# EAGLE board WIBL (EAGLE 9.6.2)
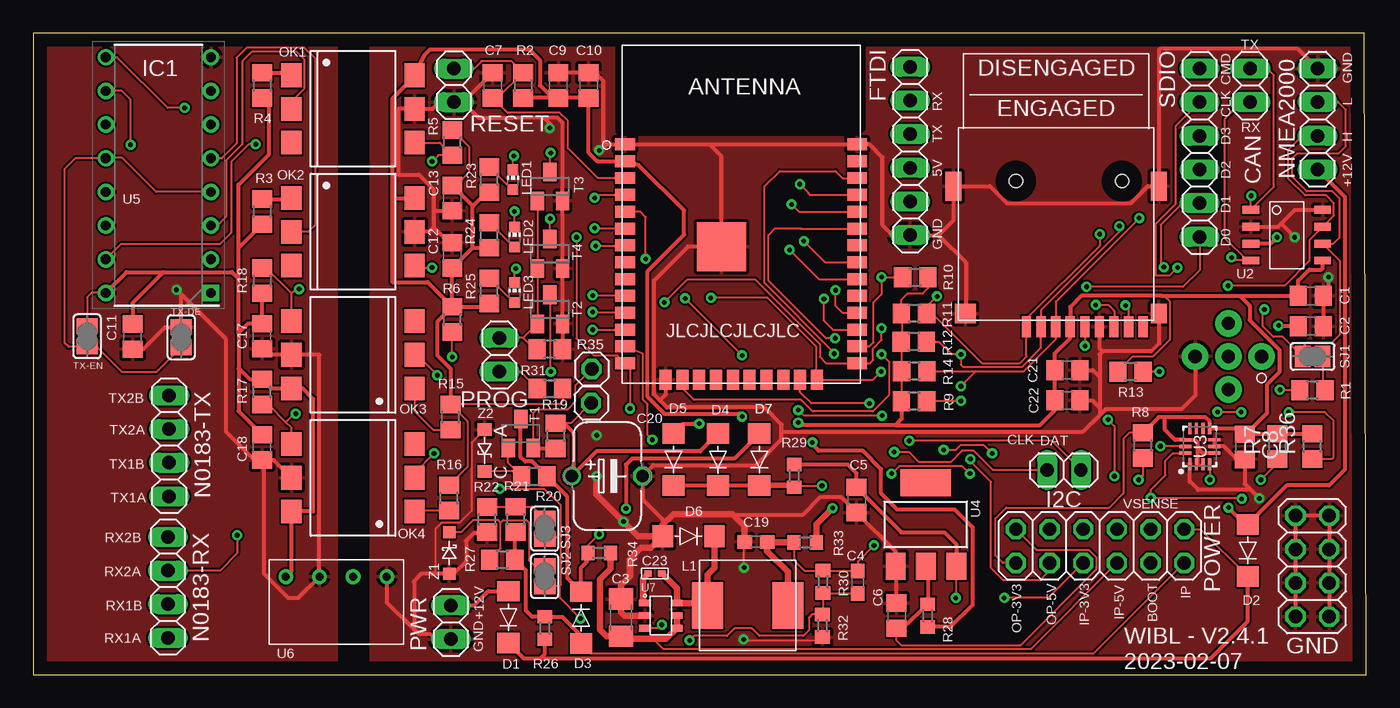
[diagram p0: board, top side]
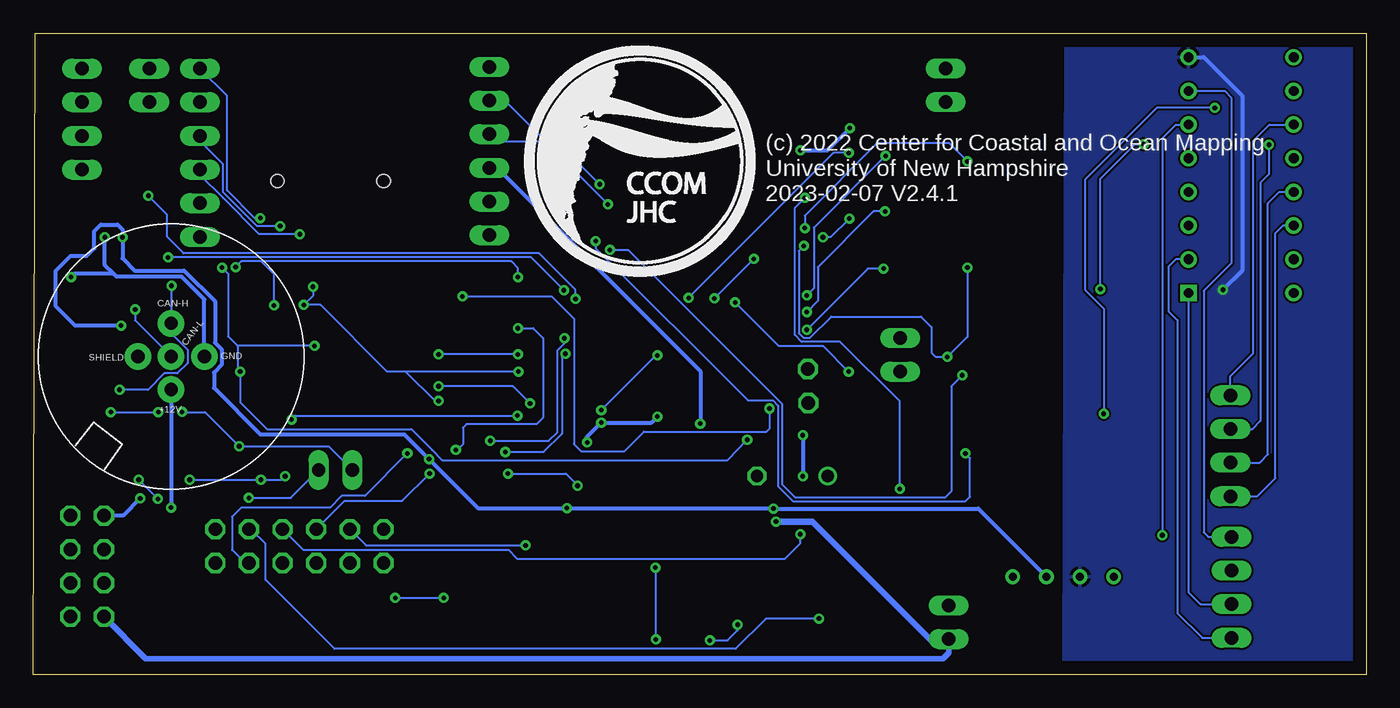
[diagram p1: board, bottom side, seen from below]

Size 100.58 x 48.39 mm. Coordinates in mm from the lower left corner, seen from the top.
Outline: 0,0 100.58,0 100.43,48.39 0,48.39 0,0
Copper layers (1*16): Top 0.035mm / dielectric 1.5mm / Bottom 0.035mm
Design rules "default": minimum track width 6mil, minimum drill 0.35mm, track to track 6mil, track to pad 6mil, pad to pad 6mil, via to via 6mil, smd to smd 6mil, copper to edge 40mil, drill to drill 6mil, minimum pad ring 10mil, minimum via ring 8mil, stop-mask expansion 4mil, vias tented up to drill 0mil, thermal gap 10mil

## Footprints (pad centres in the part's own frame; a part is rotated, then mirrored left to right if it is on the bottom)
C0805 = smd 1.3 x 1.5: 1 -0.95,0; 2 0.95,0
C1206 = smd 1.6 x 1.8: 1 -1.4,0; 2 1.4,0
C0603 = smd 1.1 x 1: 1 -0.85,0; 2 0.85,0
P128-50 = drill 0.914: + -2.667,0 | drill 0.914 octagon: - 2.667,0
C0402 = smd 0.55 x 0.5: P$1 -0.525,0; P$2 0.525,0
1X02 = drill 1.016 long: 1 -1.27,0; 2 1.27,0
DO-214AC = smd 1.524 x 1.676: A 1.956,0; K -1.956,0
1X06 = drill 1.016 long: 1 -6.35,0; 2 -3.81,0; 3 -1.27,0; 4 1.27,0; 5 3.81,0; 6 6.35,0
2X04 = drill 1.016 octagon: 1 -3.81,-1.27; 2 -3.81,1.27; 3 -1.27,-1.27; 4 -1.27,1.27; 5 1.27,-1.27; 6 1.27,1.27; 7 3.81,-1.27; 8 3.81,1.27
XUNPU-MICROSD-SOCKET = smd 0.7 x 1.6: 1 2.25,7.475; 2 1.15,7.475; 3 0.05,7.475; 4 -1.05,7.475; 5 -2.15,7.475; 6 -3.25,7.475; 7 -4.35,7.475; 8 -5.45,7.475; CD -6.55,7.475 | smd 1.2 x 1.5: GND1 -7.75,6.475 | smd 1.2 x 2.2: GND2 -7.75,-3.125; GND3 7.75,-3.125 | smd 1.6 x 1.5: GND4 6.85,6.475 | hole 1: -4.95,-3.525; 3.05,-3.525
DIP794W53P254L1930H508Q16N = drill 0.73 pad 1.13 square: 1 -3.97,8.89 | drill 0.73 pad 1.13: 2 -3.97,6.35; 3 -3.97,3.81; 4 -3.97,1.27; 5 -3.97,-1.27; 6 -3.97,-3.81; 7 -3.97,-6.35; 8 -3.97,-8.89; 9 3.97,-8.89; 10 3.97,-6.35; 11 3.97,-3.81; 12 3.97,-1.27; 13 3.97,1.27; 14 3.97,3.81; 15 3.97,6.35; 16 3.97,8.89
1X01 = drill 1.016 octagon: 1 0,0
NMEA2000 = drill 1 pad 2: 1 2.5,0; 2 0,-2.5; 3 -2.5,0; 4 0,2.5; 5 0,0
MWSA0603S = smd 2.35 x 3.5: P$1 -3.025,0; P$2 3.025,0
CHIP-LED0603 = smd 0.8 x 0.8: A 0,-0.75; C 0,0.75
1X04 = drill 1.016 long: 1 -3.81,0; 2 -1.27,0; 3 1.27,0; 4 3.81,0
DIL6-SMD = smd 1.78 x 1.52: 1 -2.54,-4.645; 2 0,-4.645; 3 2.54,-4.645; 4 2.54,4.645; 5 0,4.645; 6 -2.54,4.645
2X06 = drill 1.016 octagon: 1 -6.35,-1.27; 2 -6.35,1.27; 3 -3.81,-1.27; 4 -3.81,1.27; 5 -1.27,-1.27; 6 -1.27,1.27; 7 1.27,-1.27; 8 1.27,1.27; 9 3.81,-1.27; 10 3.81,1.27; 11 6.35,-1.27; 12 6.35,1.27
R0805 = smd 1.3 x 1.5: 1 -0.95,0; 2 0.95,0
R0603 = smd 1 x 1.1: 1 -0.85,0; 2 0.85,0
SJ = smd 1.168 x 1.6: 1 -0.762,0; 2 0.762,0
SOT23-BEC = smd 1 x 1.4: B -0.95,-1.1; C 0,1.1; E 0.95,-1.1
SOT23 = smd 1 x 1.4: 1 -0.95,-1.1; 2 0.95,-1.1; 3 0,1.1
ESPS32-WROOM-32E = smd 1.5 x 0.9: 1 -8.75,8.34; 2 -8.75,7.07; 3 -8.75,5.8; 4 -8.75,4.53; 5 -8.75,3.26; 6 -8.75,1.99; 7 -8.75,0.72; 8 -8.75,-0.55; 9 -8.75,-1.82; 10 -8.75,-3.09; 11 -8.75,-4.36; 12 -8.75,-5.63; 13 -8.75,-6.9; 14 -8.75,-8.17; 25 8.75,-8.17; 26 8.75,-6.9; 27 8.75,-5.63; 28 8.75,-4.36; 29 8.75,-3.09; 30 8.75,-1.82; 31 8.75,-0.55; 32 8.75,0.72; 33 8.75,1.99; 34 8.75,3.26; 35 8.75,4.53; 36 8.75,5.8; 37 8.75,7.07; 38 8.75,8.34 | smd 0.9 x 1.5: 15 -5.71,-9.42; 16 -4.44,-9.42; 17 -3.17,-9.42; 18 -1.9,-9.42; 19 -0.63,-9.42; 20 0.64,-9.42; 21 1.91,-9.42; 22 3.18,-9.42; 23 4.45,-9.42; 24 5.71,-9.42 | smd 3.7 x 3.7: THERM -1.5,0.62
SOIC8 = smd 0.6 x 1.27: 1 -1.905,-2.7; 2 -0.635,-2.7; 3 0.635,-2.7; 4 1.905,-2.7; 5 1.905,2.7; 6 0.635,2.7; 7 -0.635,2.7; 8 -1.905,2.7
LGA-14-2.5X3MM = smd 0.9 x 0.25: 1 -1.35,0.75; 2 -1.35,0.25; 3 -1.35,-0.25; 4 -1.35,-0.75; 8 1.35,-0.75; 9 1.35,-0.25; 10 1.35,0.25; 11 1.35,0.75 | smd 0.25 x 0.9: 5 -0.5,-1.1; 6 0,-1.1; 7 0.5,-1.1; 12 0.5,1.1; 13 0,1.1; 14 -0.5,1.1
SOT223 = smd 1.499 x 2.007: 1 -2.261,-3.15; 2 0.025,-3.15; 3 2.311,-3.15 | smd 3.81 x 2.007: 4 0,3.15
RFM-0505S = drill 0.6: 1 -3.81,0; 2 -1.27,0; 3 1.27,0; 4 3.81,0
SOT-23-6L = smd 0.9 x 0.5: 1 -1.2,0.95; 2 -1.2,0; 3 -1.2,-0.95; 4 1.2,-0.95; 5 1.2,0; 6 1.2,0.95
SOD123 = smd 0.9 x 0.95: 1 -1.575,0; 2 1.575,0
SOD-123FL = smd 0.95 x 1.05: A -1.575,0; K 1.575,0

## Placement (x,y rotation side)
C1  0.1u  [C0805]  96.39,28.57 0 top
C2  0.1u  [C0805]  96.39,26.29 0 top
C3  10uF  [C1206]  44.35,4.31 90 top
C4  33pF  [C0603]  62.22,6.97 90 top
C5  10u  [C0805]  62.12,13.18 270 top
C6  10u  [C0805]  65.14,4.46 90 top
C7  1uF  [C0805]  34.67,44.45 90 top
C8  0.1u  [C0805]  91.4,17.18 270 top
C9  10u  [C0805]  39.62,44.45 90 top
C10  0.1u  [C0805]  41.91,44.45 90 top
C11  0.1u  [C0805]  7.51,25.5 270 top
C12  0.1u  [C0805]  31.62,31.62 90 top
C13  0.1u  [C0805]  31.62,35.94 270 top
C17  0.1u  [C0805]  17.27,25.53 270 top
C18  0.1u  [C0805]  17.27,17.14 270 top
C19  22uF  [C0603]  54.52,10.02 0 top
C20  0.47F  [P128-50]  43.31,14.99 0 top
C21  10u  [C0805]  78.03,22.97 0 top
C22  0.1u  [C0805]  78.03,20.69 0 top
C23  100nF  [C0402]  46.91,7.65 0 top
CAN  CAN-TEST  [1X02]  91.82,44.45 90 top
D1  SS14  [DO-214AC]  35.85,4.34 90 top
D2  SS14  [DO-214AC]  91.63,9.37 90 top
D3  SS14  [DO-214AC]  41.34,4.31 270 top
D4  SS14  [DO-214AC]  51.66,16.23 90 top
D5  SS14  [DO-214AC]  48.31,16.23 90 top
D6  SS14  [DO-214AC]  49.45,10.44 180 top
D7  SS14  [DO-214AC]  54.79,16.23 90 top
FTDI  FTDI/ICSP  [1X06]  66.17,39.5 90 top
GND  [2X04]  96.51,8.19 90 top
H1  TF-115  [XUNPU-MICROSD-SOCKET]  77.19,33.72 180 top
I2C  I2C_TEST  [1X02]  77.77,15.44 180 top
IC1  SN65C1168N  [DIP794W53P254L1930H508Q16N]  9.45,37.68 180 top
JP1  [1X01]  42.14,23.05 0 top
JP2  HPC-05PMMP-SF8001  [NMEA2000]  90.17,24 0 top
JP3  [1X01]  42.1,20.5 0 top
L1  15uH  [MWSA0603S]  53.91,5.22 0 top
LED1  [CHIP-LED0603]  36.2,37.34 0 top
LED2  [CHIP-LED0603]  36.32,33.02 0 top
LED3  [CHIP-LED0603]  36.32,28.83 0 top
N0183-RX  [1X04]  10.17,6.59 270 top
N0183-TX  TX_TEST  [1X04]  10.26,17.26 270 top
NMEA2000  NMEA2000-2  [1X04]  96.9,41.91 90 top
OK1  H11L1MS  [DIL6-SMD]  24.13,42.67 270 top
OK2  H11L1MS  [DIL6-SMD]  24.13,33.4 270 top
OK3  H11L1MS  [DIL6-SMD]  24.13,24.13 90 top
OK4  H11L1MS  [DIL6-SMD]  24.13,14.86 90 top
POWER  [2X06]  80.49,9.7 180 top
PROG  PROG  [1X02]  35.18,24.13 90 top
PWR  [1X02]  31.51,3.96 90 top
R1  120R  [R0805]  96.52,21.46 180 top
R2  10k  [R0805]  36.96,44.45 270 top
R3  1k  [R0805]  17.27,34.92 270 top
R4  1k  [R0805]  17.27,44.45 270 top
R5  10k  [R0805]  31.62,40.13 90 top
R6  10k  [R0805]  31.62,26.8 90 top
R7  10k  [R0805]  93.88,17.22 90 top
R8  10k  [R0805]  83.73,17.3 90 top
R9  47k  [R0805]  66.46,20.62 180 top
R10  47k  [R0805]  66.55,29.97 0 top
R11  47k  [R0805]  66.46,27.24 180 top
R12  47k  [R0805]  66.45,25.11 180 top
R13  47k  [R0805]  82.79,22.86 180 top
R14  47k  [R0805]  66.47,22.9 180 top
R15  560  [R0805]  31.5,19.43 90 top
R16  560  [R0805]  31.37,13.34 90 top
R17  10k  [R0805]  17.27,21.34 90 top
R18  10k  [R0805]  17.27,29.72 270 top
R19  47R  [R0805]  39.42,18.02 270 top
R20  1k  [R0805]  37.81,14.96 0 top
R21  33k  [R0805]  36.39,11.72 270 top
R22  10k  [R0805]  34.25,11.71 90 top
R23  220  [R0805]  34.42,37.34 90 top
R24  220  [R0805]  34.42,33.15 90 top
R25  220  [R0805]  34.42,28.96 90 top
R26  0R1  [R0603]  38.6,3.52 270 top
R27  1k5  [R0805]  35.39,8.69 0 top
R28  0R1  [R0603]  67.49,4.46 90 top
R29  0R1  [R0603]  57.42,15 270 top
R30  127k  [R0603]  59.59,7.01 90 top
R31  6k8  [R0805]  38.99,21.59 0 top
R32  23.7k  [R0603]  59.55,3.7 90 top
R33  0R1  [R0603]  58.25,9.98 180 top
R34  0R1  [R0603]  42.71,9.18 180 top
R35  47k  [R0805]  38.98,24.54 180 top
R36  10k  [R0805]  96.51,17.22 90 top
RESET  RESET  [1X02]  31.75,44.45 270 top
SDIO  SDIO_TEST  [1X06]  88.01,39.37 90 top
SJ1  [SJ]  96.52,24 0 top
SJ2  [SJ]  38.6,7.43 90 top
SJ3  [SJ]  38.6,11.01 90 top
T1  [SOT23-BEC]  36.79,18.2 0 top
T2  S8050  [SOT23]  38.99,27.56 0 top
T3  S8050  [SOT23]  38.99,36.83 0 top
T4  S8050  [SOT23]  38.99,31.75 0 top
TX-DE  [SJ]  11.16,25.45 270 top
TX-EN  [SJ]  4.08,25.53 90 top
U1  ESP32-WROOM-32E  [ESPS32-WROOM-32E]  53.42,31.66 0 top
U2  TJA1051T/3  [SOIC8]  94.58,33.15 270 top
U3  LSM6DS3TR-C  [LGA-14-2.5X3MM]  88.01,17.22 90 top
U4  AMS1117-3.3  [SOT223]  67.34,11.33 0 top
U6  [RFM-0505S]  22.87,7.39 180 top
U7  [SOT-23-6L]  47.36,4.46 0 top
Z1  BZT52C3V0  [SOD123]  31.39,9.18 90 top
Z2  DZL4734  [SOD-123FL]  34.06,16.92 270 top

## Library data of the parts
C1-C13 C17-C22 = rcl; SPICEPREFIX: C
C23 D1-D7 H1 JP2 L1 U1 U2 U6 U7 Z1 Z2 = sb2030_logger
CAN FTDI GND I2C JP1 JP3 N0183-RX N0183-TX NMEA2000 POWER PROG PWR RESET SDIO = pinhead
IC1 = SN65C1168N; DESCRIPTION: Dual Differential Drivers And Receivers; HEIGHT: 5.08mm; MANUFACTURER_NAME: Texas Instruments; MANUFACTURER_PART_NUMBER: SN65C1168N; MOUSER_PART_NUMBER: 595-SN65C1168N; MOUSER_PRICE-STOCK: https://www.mouser.co.uk/ProductDetail/Texas-Instruments/SN65C1168N?qs=6siQ5y5nVCynC3%2F3CVM95w%3D%3D
LED1-LED3 = led
OK1-OK4 = optocoupler; OC_FARNELL: unknown; OC_NEWARK: unknown
R1-R36 = rcl; SPICEPREFIX: R
SJ1-SJ3 TX-DE TX-EN = jumper
T1-T4 = transistor
U3 = LSM6DS3TR-C; AVAILABILITY: In Stock; DESCRIPTION: IMUs - Inertial Measurement Units iNEMO 6DoF inertial module, for entry level / mid-tier smart phones and Portable PC platforms; MF: STMicroelectronics; MP: LSM6DS3TR-C; PACKAGE: None; PRICE: None; PURCHASE-URL: https://pricing.snapeda.com/search/part/LSM6DS3TR-C/?ref=eda
U4 = burr-brown; MPN: REG1117; OC_FARNELL: 1097566; OC_NEWARK: 14P6981

## Nets
+3V3: C1.1 C8.1 C9.1 C10.1 C12.1 C13.1 C21.1 C22.1 H1.4 OK1.6 OK2.6 POWER.12 R2.2 R5.2 R6.2 R7.2 R8.2 R9.2 R10.2 R11.2 R12.2 R13.2 R14.2 R15.2 R16.2 R23.1 R24.1 R25.1 R28.1 R31.2 R36.2 U1.2 U2.5 U3.2 U3.3 U3.5 U3.8 U3.12
+5V: C2.1 D7.A POWER.10 R33.1 U2.3 U6.2
+12V: D1.A PWR.2
BOOT: POWER.4 T2.3 U1.25
CAN-12V: D2.A JP2.2 NMEA2000.1
FTDI-5V: D5.A FTDI.3
GND: C1.2 C2.2 C3.2 C5.2 C6.2 C7.2 C8.2 C9.2 C10.2 C12.2 C13.2 C19.1 C20.- C21.2 C22.2 D6.A FTDI.1 GND.1 GND.2 GND.3 GND.4 GND.5 GND.6 GND.7 GND.8 H1.6 H1.GND1 H1.GND2 H1.GND3 H1.GND4 JP2.3 NMEA2000.4 OK1.5 OK2.5 PWR.1 R22.1 R32.1 R35.1 RESET.2 T2.2 T3.2 T4.2 U1.1 U1.15 U1.38 U1.THERM U2.2 U2.8 U3.1 U3.6 U3.7 U4.1 U6.1 U7.2 Z1.1 Z2.A
GNDI: C11.2 C17.2 C18.2 IC1.8 OK3.5 OK4.5 TX-DE.1 U6.3
INT1: R8.1 U1.5 U3.4
IP_CUR_3V3_H: D4.K D5.K D7.K POWER.7 R29.2
IP_CUR_3V3_L: C5.1 POWER.8 R29.1 U4.3
IP_CUR_5V_H: D3.K POWER.5 R20.2 R34.2 T1.C
IP_CUR_5V_L: C3.1 POWER.6 R34.1 U7.4 U7.5
IP_CUR_H: D1.K D2.K POWER.1 R26.2
IP_CUR_L: D3.A POWER.2 R21.2 R26.1 R27.2
N$1: JP2.4 NMEA2000.2 R1.2 U2.7
N$2: JP2.5 NMEA2000.3 SJ1.1 U2.6
N$3: R1.1 SJ1.2
N$4: C7.1 R2.1 RESET.1 U1.3
N$5: IC1.2 N0183-RX.4
N$6: CAN.2 U1.27 U2.1
N$7: CAN.1 U1.28 U2.4
N$8: IC1.14 N0183-TX.4
N$9: IC1.1 N0183-RX.3
N$10: H1.1 R11.1 SDIO.3 T4.3 U1.14
N$11: H1.8 R10.1 SDIO.2 U1.26
N$12: IC1.6 N0183-RX.2
N$13: IC1.3 OK1.2
N$14: IC1.5 OK2.2
N$15: OK1.1 R4.1
N$16: OK2.1 R3.1
N$17: IC1.7 N0183-RX.1
N$18: IC1.13 N0183-TX.3
N$19: IC1.10 N0183-TX.2
N$20: IC1.11 N0183-TX.1
N$21: C11.1 C17.1 C18.1 IC1.4 IC1.12 IC1.16 OK3.6 OK4.6 R3.2 R4.2 R17.2 R18.2 TX-DE.2 TX-EN.1 TX-EN.2 U6.4
N$22: H1.7 R9.1 SDIO.1 T3.3 U1.24
N$24: H1.2 R12.1 SDIO.4 U1.16
N$25: H1.5 R13.1 SDIO.5 U1.13
N$26: H1.3 R14.1 SDIO.6 U1.23
N$31: OK3.1 R15.1
N$32: OK4.1 R16.1
N$33: IC1.15 OK3.4 R18.1
N$34: IC1.9 OK4.4 R17.1
N$35: LED1.C U1.10
N$36: LED2.C U1.11
N$37: PROG.2 R35.2 T2.1 T3.1 T4.1
N$38: LED3.C U1.12
N$39: LED1.A R23.2
N$40: LED2.A R24.2
N$41: R20.1 T1.B Z2.K
N$42: C23.P$1 U7.1
N$43: PROG.1 R31.1
N$44: LED3.A R25.2
N$45: C23.P$2 D6.K L1.P$1 U7.6
N$46: R21.1 R22.2 SJ3.2
N$48: C4.1 R30.1 R32.2 U7.3
OP_CUR_3V3_H: C6.1 POWER.11 R28.2 U4.2
OP_CUR_5V_H: C4.2 C19.2 L1.P$2 POWER.9 R30.2 R33.2
RX1: OK1.4 R5.1 U1.6
RX2: OK2.4 R6.1 U1.7
RXDATA: FTDI.5 U1.35
SCAP: C20.+ D4.A JP3.1 R19.1
SCAPDRV: JP1.1 R19.2 T1.E
SCL: I2C.1 R7.1 U1.33 U3.14
SDA: I2C.2 R36.1 U1.36 U3.13
TX1: OK3.2 U1.30
TX2: OK4.2 U1.31
TXDATA: FTDI.4 U1.34
VSENSE: POWER.3 R27.1 SJ2.1 SJ2.2 SJ3.1 U1.4 Z1.2

## Tracks (layer width: path | path; a pad name or v marks a point on that pad's centre or on a via)
+3V3  (via drill 0.35)
  Top 0.152: R31.2 39.94,20.58 39.74,20.38 R15.2 32.77,19.11 32.77,15.68 R16.2 | R5.2 32.88,39.83 32.88,37.91 31.74,36.77 | R13.2 82.98,24 84.51,24 85.8,25.29 85.8,28.14 85.57,28.37 | 85.57,28.37 85.57,28.57 | 85.57,28.37 85.36,28.57 85.15,28.57 | POWER.12 73.15,8.43 72.58,9 72.58,11.77 73.42,12.61 81.19,12.61 82.26,13.68 82.26,17.8 82.7,18.25 R8.2 | R9.2 65.52,20.64 R14.2 65.52,25.08 R12.2 65.53,25.14 65.53,27.22 R11.2 65.51,28.29 65.99,28.77 67.13,28.77 67.5,29.13 R10.2 | C8.1 91.44,18.17 91.52,18.17 | U3.2 87.82,15.87 U3.3
  Top 0.305: 27.09,35.9 27.09,43.43 28.77,45.12 OK1.6 29.5,46.73 29.92,47.14 37.44,47.14 38.23,46.35 38.23,44.45 39.18,43.5 C9.1 | 27.09,35.9 28.74,35.9 OK2.6 | R6.2 C12.1 33.15,32.2 | 27.09,35.9 27.09,29.6 29.77,29.6 R6.2 | 33.15,32.2 33.15,35.37 | 33.15,35.37 31.74,36.77 C13.1 | R6.2 30.48,26.6 30.48,24.08 31.5,23.06 R15.2 | 65.04,18.82 57.91,18.82 v57.72,19.01 | 91.02,28.57 85.57,28.57 85.15,28.57 79.1,28.57 78.24,27.72 H1.4 78.24,25.4 77.08,24.23 C21.1 C22.1 77.08,19.93 75.97,18.82 65.04,18.82 | 91.02,28.57 C1.1 95.44,29.72 96.28,30.56 97.19,30.56 97.28,30.64 U2.5 | 91.02,28.57 91.78,27.81 91.78,26.75 94.03,24.5 94.03,22.82 93.08,21.87 93.08,19.73 91.52,18.17 R7.2 R36.2 | R9.2 65.51,19.29 65.04,18.82 | C9.1 C10.1 41.91,39.37 42.55,38.73 U1.2 45.68,38.44 49.11,35.01 49.11,33.19 46.37,30.44 46.37,20.96 47.59,19.74 47.59,19.7 53.26,19.7 v53.49,19.47 | C9.1 R2.2 | v58.79,17.53 58.79,17.37 59.28,16.88 62.6,16.88 63.97,15.51 63.97,13.68 65.19,12.46 69.53,12.46 70.87,11.12 70.87,5.26 69.22,3.61 R28.1 | 33.15,32.2 R24.1 | R6.2 34.16,27.75 R25.1 | 33.15,35.37 33.2,35.37 34.22,36.39 R23.1 | 87.82,17.14 87.82,17.53 87.62,17.72 U3.12 86.14,17.72 85.38,18.48 85.38,19.43 | 87.82,17.14 87.82,15.87 | U3.5 88.24,16.72 87.82,17.14 | 85.38,19.43 88.43,19.43 88.76,19.1 U3.8 90.96,18.57 C8.1 | 85.38,19.43 84.92,19.43 R8.2
  Bottom 0.305: v53.49,19.47 53.95,19.01 v57.72,19.01 58.79,17.95 v58.79,17.53
+5V  (via drill 0.35)
  Top 0.152: POWER.10 76.68,7.84 75.97,7.12 73.22,7.12 72.28,8.06 72.28,14.55 70.64,16.19
  Top 0.305: 70.64,16.19 v70.71,16.27 | v93.95,26.33 95.41,26.33 C2.1 | v93.84,32.99 93.36,32.51 U2.3 | D7.A 52.91,16.31 45.19,16.31 44.73,15.85 v44.73,12.54
  Top 0.508: v60.31,12.57 59.11,11.37 R33.1
  Bottom 0.305: v93.95,26.33 97.42,26.33 98.87,27.77 98.87,30.48 97.77,31.59 96.55,31.59 95.97,32.16 95.97,33.45 95.48,33.95 94.22,33.95 93.84,33.57 v93.84,32.99 93.84,31.39 92.93,30.48 89.19,30.48 86.87,28.16 86.87,25.05 86.37,24.54 86.37,23.36 86.94,22.78 86.94,21.64 83.44,18.14 72.58,18.14 v70.71,16.27 67.02,12.57 v60.31,12.57 44.77,12.57 v44.73,12.54 29.29,12.54 U6.2
+12V
  Top 0.305: PWR.2 33.26,5.23 34.33,6.3 D1.A
BOOT  (via drill 0.35)
  Top 0.152: T2.3 38.99,23.18 39.01,23.16 39.01,22.9 v39.06,22.86 | v64,26.14 64,25.25 63.36,24.6 63.36,23.74 63.12,23.49 U1.25 59.83,23.5 59.36,23.96 59.36,24.93 54.5,29.79 49.34,29.79 v47.62,28.08 | v68.69,16.95 69.61,16.95 69.99,17.34 71.7,17.34 v72.35,16.69
  Bottom 0.152: v39.06,22.86 41,24.8 44.34,24.8 v47.62,28.08 | v64,26.14 62.86,26.14 62.1,25.38 62.1,19.39 62.6,18.9 67.89,18.9 68.16,18.63 68.16,17.37 68.58,16.95 v68.69,16.95 | v72.35,16.69 75.55,13.49 77.31,13.49 78.18,12.61 84.89,12.61 85.57,11.93 85.57,9.41 84.59,8.43 POWER.4
CAN-12V  (via drill 0.35)
  Top 0.305: NMEA2000.1 98.96,36.04 98.96,15.47 97.78,14.29 94.56,14.29 91.63,11.35 D2.A 91.47,11.33 v90.18,12.61
  Bottom 0.305: JP2.2 90.17,12.62 v90.18,12.61
FTDI-5V  (via drill 0.35)
  Top 0.305: v50.25,18.94 50.22,18.9 49.02,18.9 D5.A
  Bottom 0.305: FTDI.3 65.58,38.23 50.25,22.9 v50.25,18.94
GND  (via drill 0.35)
  Top 0.152: Z2.A 33.07,17.5 33.07,12.36 32.17,11.47 30.82,11.47 30.33,10.97 30.33,7.85 30.09,7.61 | R32.1 59.26,2.55 53.8,2.55 53.68,2.67 v53.61,2.67 | v53.65,8.08 53.65,9.99 C19.1 | C8.2 90.83,16.23 | 87.25,15.86 U3.1 | U1.1 44.81,40
  Top 0.305: 56.46,18.33 56.46,17.75 54.52,15.81 46.8,15.81 C20.- 45.97,13.23 47.5,11.71 D6.A | 56.46,18.33 56.46,18.86 55.17,20.16 47.82,20.16 47.28,20.69 | 47.28,20.69 46.83,21.14 46.83,29.72 49.39,32.28 U1.THERM 51.92,39.1 51.02,40 | 43.24,40.01 43.02,40.23 43.02,44.77 42.38,45.4 C10.2 C9.2 | C7.2 32.45,43.18 | 32.45,43.18 RESET.2 30.64,43.18 30.14,42.67 OK1.5 27.62,42.67 27.55,42.6 27.55,37.72 29.11,37.72 30.21,36.61 30.21,35.13 | 38.56,42.01 39.57,42.01 39.97,41.6 39.94,41.58 T3.2 T4.2 T2.2 R35.1 | 38.56,42.01 36.14,42.01 36.12,41.99 33.65,41.99 32.45,43.18 | 30.21,35.13 30.35,34.99 C13.2 | 30.21,35.13 30.21,33.76 | OK2.5 29.86,33.4 30.21,33.76 | 30.21,33.76 31.4,32.57 C12.2 | 68.31,33.15 FTDI.1 64.85,33.15 64.08,33.91 64.08,39 63.08,40 U1.38 51.02,40 | 68.31,33.15 69.47,34.3 69.47,36.82 H1.GND3 72.18,36.84 73.45,35.58 82.83,35.58 84.1,36.84 H1.GND2 84.94,47.11 85.04,47.21 95.42,47.21 NMEA2000.4 | 68.31,33.15 70.37,31.09 70.37,27.27 H1.GND4 | 56.46,18.33 79.21,18.33 80.47,19.58 | JP2.3 87.67,21.07 86.64,20.04 80.92,20.04 80.47,19.58 | 80.47,22.44 80.47,24.15 80.7,24.38 | 80.47,22.44 80.47,20.12 | 80.47,20.12 80.47,19.58 | 80.7,24.38 84.35,24.38 84.97,25 84.97,27.22 H1.GND1 | U2.2 93.9,33.78 94.28,34.16 | 94.28,34.16 95.17,35.05 U2.8 | v97.73,29.98 97.73,28.96 C1.2 C2.2 | v95.17,32.99 94.28,33.88 94.28,34.16 | H1.6 80.44,24.64 80.7,24.38 | 43.24,40.01 U1.1 | U1.15 47.71,21.11 47.28,20.69 | 44.81,40 51.02,40 | C22.2 79.9,20.69 80.47,20.12 | C21.2 79.93,22.97 80.47,22.44 | U6.1 26.68,5.47 28.73,3.43 | PWR.1 30.33,2.69 29.95,3.07 29.08,3.07 28.73,3.43 | R22.1 34.16,10.67 33.22,10.67 32.65,10.1 32.65,8.53 31.72,7.61 Z1.1 30.09,7.61 29.29,7.61 28.73,7.05 28.73,3.43
  Top 0.305: C6.2 65.14,8.12 U4.1 65.08,9.27 C5.2 60.98,13.37 59.36,13.37 58.03,12.04 52.84,12.04 52.77,12.12 | GND.2 GND.4 GND.6 GND.8 GND.7 GND.5 GND.3 GND.1 | 43.24,40.01 42.78,39.54 v42.7,39.54 | v38.98,41.22 38.98,41.59 38.56,42.01 | 90.83,16.23 89.84,17.22 U3.6 U3.7 | C8.2 91.4,14.4 91.86,13.95 | v92.51,13.3 91.86,13.95 | 91.86,13.95 87.9,13.95 87.25,14.59 87.25,15.86
  Top 0.508: D6.A 46.62,9.56 45.87,9.56 45.03,8.72 45.03,7.43 44.35,6.74 C3.2 44.35,4.72 44.62,4.46 U7.2 | D6.A 45.64,10.44 v44.54,11.54 42.52,13.56 v42.52,14.97 | C19.1 53.67,11.21 52.77,12.12 48.31,12.12 47.5,11.3 D6.A
  Bottom 0.152: v53.65,8.08 53.65,2.71 v53.61,2.67
  Bottom 0.305: JP2.3 87.67,28.31 89.38,30.02 94.3,30.02 94.51,30.23 | 94.51,30.23 95.17,30.9 v95.17,32.99 | 94.51,30.23 97.48,30.23 v97.73,29.98 | v42.7,39.54 40.66,39.54 v38.98,41.22 | v92.51,13.3 93.8,12 GND.8 | v42.52,18.06 v42.52,14.97
  Bottom 0.406: GND.2 92.08,1.22 31.95,1.22 31.51,1.66 PWR.1
  Bottom 0.508: v44.54,11.54 41.8,11.54 32.91,2.65 31.55,2.65 PWR.1
  pour Top: 25.45,48.39 43.78,48.39 43.78,40.96 44.16,40.58 62.48,40.58 62.94,41.03 62.94,47.28 63.93,48.27 100.32,48.27 100.32,-0.04 25.45,-0.04
  pour Top: 25.49,48.31 43.01,48.31 43.82,47.51 43.82,40.77 44.04,40.54 62.33,40.54 62.9,41.11 62.9,47.32 63.86,48.27 100.43,48.27 100.43,0 25.49,0
GNDI  (via drill 0.35)
  Top 0.305: C17.2 17.72,24.13 OK3.5 21.59,24.13 21.59,7.4 U6.3 20,5.79 19.24,5.79 17.41,7.62 17.41,16.05 | OK4.5 18.15,16.2 17.41,16.2 | 17.41,16.2 C18.2 | 17.41,16.05 17.41,16.2 | C18.2 17.41,16.05 | C18.2 16.7,16.2 14.55,18.34 14.55,25.3 v10.82,29.03 11.16,28.69 TX-DE.1 9.97,26.21 8.31,24.55 C11.2
  Bottom 0.305: IC1.8 12.28,46.57 9.37,43.67 9.37,30.48 v10.82,29.03
  pour Top: 22.9,0.04 0.09,0.04 0.09,48.35 22.9,48.35
  pour Bottom: -0.03,48.39 22.75,48.39 22.9,0.04 -0.03,0.04
INT1  (via drill 0.35)
  Top 0.152: v83.4,14.71 83.73,15.04 R8.1 | v81.09,19.24 81.57,18.75 v81.57,14.97 | v57.72,19.96 58.14,19.54 v64.05,19.54 | v46.22,31.36 46.22,34.52 45.81,34.92 U1.5 | v53.49,24.08 v49.19,28.38 | v88.77,14.7 88.76,14.72 U3.4
  Bottom 0.152: v81.57,14.97 81.84,14.71 v83.4,14.71 v88.77,14.71 v88.77,14.7 | v81.09,19.24 80.78,19.55 v64.05,19.55 v64.05,19.54 | v57.72,19.96 53.61,24.08 v53.49,24.08 | v49.19,28.38 v46.22,31.36
IP_CUR_3V3_H  (via drill 0.35)
  Top 0.152: v70.67,15.16 70.1,15.73 65.34,15.73 v64.77,15.17 | R29.2 57.52,14.25 v59.51,14.25
  Top 0.305: D5.K D4.K D7.K
  Top 0.406: D7.K 57.19,14.28 R29.2
  Bottom 0.152: POWER.7 77.09,13.11 72.73,13.11 v70.67,15.16 | v64.77,15.17 60.39,15.17 59.51,14.29 v59.51,14.25
IP_CUR_3V3_L  (via drill 0.35)
  Top 0.152: v69.61,5.79 69.65,5.83 69.65,8.34 | v73.27,5.79 76.58,5.79 POWER.8
  Top 0.305: U4.3 69.65,8.34 69.65,9.83 68.73,10.74 65.5,10.74 C5.1 62.12,15.19 61.46,15.85 R29.1
  Bottom 0.152: v73.27,5.79 v69.61,5.79
IP_CUR_5V_H  (via drill 0.35)
  Top 0.152: v42.71,10.59 41.76,9.64 R34.2
  Top 0.305: T1.C 36.79,16.42 37.12,16.09 37.62,16.09 R20.2 40.31,13.41 40.31,7.29 D3.K 41.34,8.08 41.76,8.5 R34.2
  Bottom 0.152: POWER.5 80.21,9.42 73.73,9.42 73.72,9.41 64.73,9.41 64.08,8.76 43.85,8.76 42.71,9.91 v42.71,10.59
IP_CUR_5V_L
  Top 0.152: POWER.6 75.26,1.93 47.55,1.93 46.98,2.5 46.98,2.71
  Top 0.508: U7.5 U7.4 47.76,2.71 46.98,2.71 44.55,2.71 C3.1 43.27,2.9 42.79,3.39 42.79,7.2 43.56,7.97 R34.1
IP_CUR_H
  Top 0.152: D2.K 88.07,10.97 POWER.1
  Top 0.305: D2.K 91.63,4.04 88.8,1.21 38.25,1.21 | D1.K 37.03,1.21 38.25,1.21 | R26.2 38.59,1.55 38.25,1.21
IP_CUR_L
  Top 0.152: POWER.2 80,1.59 42.1,1.59 D3.A
  Top 0.305: R21.2 36.34,10.73 R27.2 37.19,7.85 37.19,4.84 37.66,4.37 R26.1 39.91,4.37 41.34,2.94 D3.A
N$1  (via drill 0.35)
  Top 0.152: NMEA2000.2 95.75,40.64 94.69,39.58 94.69,37.42 95.96,36.16 97.55,36.16 98.14,35.56 98.14,34.62 97.3,33.78 U2.7 96.28,32.78 96.28,31.2 94.41,29.34 92.83,29.34 92.77,29.34 v90.14,29.34 | R1.2 94.09,21.46 v94.07,21.49
  Bottom 0.152: v90.14,29.34 90.17,29.31 JP2.4 90.17,25.74 88.94,24.51 88.94,23.49 89.7,22.73 90.68,22.73 91.92,21.49 v94.07,21.49
N$2  (via drill 0.35)
  Top 0.152: NMEA2000.3 98.48,43.18 99.03,42.62 99.03,39.87 98.49,39.32 95.38,39.32 95,38.94 95,37.55 96.08,36.46 98,36.46 98.58,35.88 98.58,33.01 98.08,32.51 U2.6 98.58,31.21 98.58,25.64 97.97,25.03 96.09,25.03 95.76,24.7 SJ1.1 94.27,25.49 93.58,25.49 92.78,26.29 92.78,27.43 v92.89,27.55
  Bottom 0.152: v92.89,27.55 92.89,26.72 JP2.5
N$3
  Top 0.152: SJ1.2 97.28,21.65 R1.1
N$4
  Top 0.152: RESET.1 33.27,45.72 33.83,46.28 36.08,46.28 R2.1 35.06,43.5 C7.1 35.8,42.37 35.96,42.37 35.98,42.39 39.73,42.39 40.35,41.76 40.35,39.7 42.58,37.47 U1.3
N$5
  Bottom 0.152: IC1.2 13.46,31.37 14.33,31.37 14.94,30.77 14.94,27.43 14.25,26.75 14.25,4.65 12.38,2.78 N0183-RX.4
N$6  (via drill 0.35)
  Top 0.152: v59.66,28.35 59.66,26.71 60.34,26.04 U1.27 | v91.9,36.12 91.88,36.1 U2.1 93.61,36.79 93.61,45.23 93.12,45.72 CAN.2
  Bottom 0.152: v59.66,28.35 59.66,29.03 62.41,31.77 89.23,31.77 90.49,33.03 90.49,34.71 v91.9,36.12
N$7  (via drill 0.35)
  Top 0.152: v60.54,28.99 60.54,27.81 61.05,27.3 U1.28 | v90.41,31.47 90.64,31.24 U2.4 91.59,31.24 89.92,32.92 89.92,41.95 91.15,43.18 CAN.1
  Bottom 0.152: v60.54,28.99 63.02,31.47 v90.41,31.47
N$8
  Bottom 0.152: N0183-TX.4 8.24,13.45 6.86,14.83 6.86,33.3 6.29,33.87 IC1.14
N$9
  Bottom 0.152: IC1.1 13.42,6.22 12.52,5.32 N0183-RX.3
N$10  (via drill 0.35)
  Top 0.152: T4.3 38.99,34.38 v39.01,34.4 | v41,32.99 41,25.38 42.31,24.06 44.09,24.06 U1.14 45.06,23.09 45.06,20.11 v45.03,20.08 | v80.47,33.22 80.47,32.36 74.94,26.83 H1.1 74.94,24 74.45,23.51 71.59,23.51 67.86,27.24 R11.1 67.41,27.75 v68.2,28.54
  Bottom 0.152: v39.01,34.4 40.42,32.99 v41,32.99 | v45.03,20.08 45,20.04 45,18.59 45.26,18.33 54.5,18.33 55.98,16.84 59.23,16.84 59.78,17.39 59.78,26.86 61.46,28.54 v68.2,28.54 | v80.47,33.22 83.52,33.22 86.26,35.97 88.01,37.72 SDIO.3
N$11  (via drill 0.35)
  Top 0.152: R10.1 65.58,29.98 v64.01,29.98 64.01,28.69 63.4,28.08 63.4,25.07 63.09,24.77 U1.26 | v85.31,30.75 85.08,30.98 85.08,33.95 86.69,35.56 SDIO.2 | v82.41,27.85 82.64,27.62 H1.8
  Bottom 0.152: v64.01,29.98 64.01,30.67 64.5,31.17 83.36,31.17 | v85.31,30.75 84.89,31.17 83.36,31.17 | v82.41,27.85 82.41,30.21 83.36,31.17
N$12  (via drill 0.35)
  Top 0.152: v15.39,10.52 15.39,9.14 14.11,7.86 N0183-RX.2
  Bottom 0.152: IC1.6 14.37,41.49 15.39,40.47 v15.39,10.52
N$13
  Top 0.152: OK1.2 19.48,43.24 20.47,44.23 20.47,46.39 19.87,46.99 16.5,46.99 15.77,46.27 15.77,40.01 14.55,38.79 14.55,34.56 13.87,33.87 IC1.3
N$14
  Top 0.152: OK2.2 20.76,33.4 21.3,33.93 21.3,46.46 20.46,47.3 16.12,47.3 15.35,46.53 15.35,40.08 14.22,38.95 IC1.5
N$15
  Top 0.305: R4.1 19.42,45.4 OK1.1
N$16
  Top 0.305: R3.1 19.55,35.88 OK2.1
N$17
  Bottom 0.152: IC1.7 10.69,44.03 10.17,43.51 10.17,31.05 12.27,28.96 12.27,10.74 11.93,10.4 N0183-RX.1
N$18
  Bottom 0.152: N0183-TX.3 8.05,15.99 7.43,16.61 7.43,35.55 6.57,36.41 IC1.13
N$19  (via drill 0.35)
  Top 0.152: v7.35,39.97 7.35,43.38 6.7,44.03 IC1.10
  Bottom 0.152: N0183-TX.2 8.62,18.53 8,19.15 8,37.11 7.35,37.76 v7.35,39.97
N$20
  Bottom 0.152: N0183-TX.1 10.26,22.52 8.53,24.24 8.53,40.26 7.31,41.49 IC1.11
N$21
  Top 0.152: 5.45,38.98 3.2,38.98 2.4,38.18 2.4,24.99 2.67,24.73 4.84,24.73 | 5.45,38.98 IC1.12 | IC1.4 9.27,36.41 6.71,38.98 5.45,38.98 | TX-DE.2 9.3,22.82 6.71,22.82 4.84,24.69 4.84,24.73 | 4.84,24.73 4.84,24.77 TX-EN.1 TX-EN.2 4.08,28.46 4.41,28.79 IC1.16
  Top 0.305: R18.2 C17.1 16.19,26.48 15.49,25.78 | 15.49,25.78 15.49,23.11 | 15.49,23.11 16.32,22.29 R17.2 17.97,21.59 OK3.6 20.33,21.59 21.13,20.79 21.13,12.32 OK4.6 19.48,7.81 U6.4 | 15.49,23.11 15.49,19.87 C18.1 | 15.49,25.78 15.49,29.87 | 15.49,29.87 15.49,32.2 | R3.2 15.49,32.2 | R4.2 17.8,42.97 17.8,39.27 15.49,36.96 15.49,32.2 | 9.83,30.37 7.05,30.37 IC1.16 | 9.83,30.37 15,30.37 15.49,29.87 | 9.83,30.37 7.51,28.04 C11.1
N$22  (via drill 0.35)
  Top 0.152: T3.3 38.99,39.29 v39.05,39.36 | v51.13,28.42 55.4,28.42 59.05,24.77 59.05,22.36 58.98,22.29 59.13,22.29 U1.24 63.35,22.24 v63.97,22.86 | v80.16,27.89 81.12,27.89 81.57,27.44 81.57,26.27 H1.7 | SDIO.1 88.01,30.52 86.75,29.26 v79.48,29.26 | v69.99,20.65 69.96,20.62 R9.1
  Bottom 0.152: v39.05,39.36 40.2,39.36 v51.13,28.42 | v63.97,22.86 72.47,22.86 | 72.47,22.86 73.88,22.86 78.91,27.89 v80.16,27.89 79.48,28.57 v79.48,29.26 | 72.47,22.86 70.26,20.65 v69.99,20.65
N$24  (via drill 0.35)
  Top 0.152: v64.01,24.16 64.58,23.59 64.58,21.09 63.34,19.85 58.81,19.85 57.94,20.73 49.87,20.73 48.98,21.62 U1.16 | v81.95,33.83 81.95,33.41 76.04,27.5 H1.2 76.04,24.64 74.6,23.2 70.18,23.2 69.99,23.39 v69.99,24.16 69.3,24.16 68.35,25.11 R12.1
  Bottom 0.152: v81.95,33.83 83.69,33.83 86.26,36.4 86.26,38.51 88.01,40.26 SDIO.4 | v64.01,24.16 v69.99,24.16
N$25  (via drill 0.35)
  Top 0.152: v84.96,22.86 R13.1 | v46.71,17.72 46.36,18.07 46.36,20.39 45.99,20.76 45.99,24.25 U1.13 | SDIO.5 86.22,41.39 86.22,35.52 84.7,34 84.7,30.1 85.73,30.1 v86.34,30.71 | H1.5 79.36,26.22 v79.36,24.8
  Bottom 0.152: v46.71,17.72 48.19,16.19 69.72,16.19 70.49,16.96 70.48,16.96 72.04,18.52 82.94,18.52 84.96,20.54 v84.96,22.86 85.16,23.05 85.16,24.8 | 85.16,24.8 85.88,25.52 85.88,30.25 v86.34,30.71 | v79.36,24.8 85.16,24.8
N$26  (via drill 0.35)
  Top 0.152: v63.09,20.46 58.71,20.46 57.87,21.31 U1.23 | v83.44,34.44 77.14,28.14 H1.3 77.14,25.29 74.75,22.9 71.09,22.9 | R14.1 71.09,22.9 | v69.99,21.75 71.09,22.86 71.09,22.9
  Bottom 0.152: v83.44,34.44 83.86,34.44 85.95,36.54 85.95,43.66 SDIO.6 | v63.09,20.46 64.39,21.75 v69.99,21.75
N$31
  Top 0.152: OK3.1 28.77,19.88 30.17,18.48 R15.1
N$32
  Top 0.152: R16.1 28.84,12.38 OK4.1
N$33  (via drill 0.35)
  Top 0.152: OK3.4 19.48,28.77 | 17.59,30.67 19.48,28.77 | 19.48,28.77 19.79,29.08 v20.07,29.08 | IC1.15 6.61,32.46 14.06,32.46 14.94,33.34 14.94,38.67 16.27,40.01 v16.8,40.01
  Top 0.305: R18.1 17.59,30.67
  Bottom 0.152: v20.07,29.08 20.07,37.41 17.47,40.01 v16.8,40.01
N$34  (via drill 0.35)
  Top 0.152: OK4.4 19.48,18.61 19.05,19.05 | 19.05,19.05 17.71,20.39 | 19.05,19.05 19.68,19.68 v19.81,19.68 | v11.43,42.75 10.14,42.75 6.32,46.57 IC1.9
  Top 0.305: 17.71,20.39 R17.1
  Bottom 0.152: v11.43,42.75 15.81,42.75 21.22,37.34 21.22,29.02 19.81,27.61 v19.81,19.68
N$35  (via drill 0.35)
  Top 0.152: LED1.C 36.2,39.05 v36.27,39.13 | v42.22,28.61 44.67,28.61 U1.10
  Bottom 0.152: v36.27,39.13 41.68,33.72 41.68,29.15 v42.22,28.61
N$36  (via drill 0.35)
  Top 0.152: LED2.C 36.31,33.78 v36.31,34.94 | v42.22,27.36 44.67,27.36 U1.11
  Bottom 0.152: v36.31,34.94 37.19,34.94 41.38,30.75 41.38,28.19 v42.22,27.36
N$37
  Top 0.152: T3.1 T4.1 T2.1 36.98,25.4 | 36.98,25.4 PROG.2 | R35.2 37.84,24.54 36.98,25.4
N$38  (via drill 0.35)
  Top 0.152: LED3.C 36.32,30.49 36.42,30.59 v36.42,30.63 | v42.22,26.02 U1.12
  Bottom 0.152: v36.42,30.63 37.61,30.63 v42.22,26.02
N$39
  Top 0.152: R23.2 36.12,36.59 LED1.A
N$40
  Top 0.152: R24.2 36.24,32.27 LED2.A
N$41
  Top 0.152: T1.B 35.84,15.98 R20.1 36.48,15.34 Z2.K
N$42
  Top 0.508: C23.P$1 46.39,7.6 46.03,7.24 46.03,5.54 U7.1
N$43
  Top 0.152: PROG.1 36.77,22.86 R31.1
N$44
  Top 0.152: R25.2 36.24,28.08 LED3.A
N$45
  Top 0.508: D6.K 51.41,8.05 50.89,7.53 50.89,5.41 | 50.89,5.41 L1.P$1 | 50.89,5.41 50.88,5.41 U7.6 48.56,6.52 C23.P$2
N$46
  Top 0.152: R22.2 36.37,12.66 R21.1 37.7,12.67 SJ3.2
N$48  (via drill 0.35)
  Top 0.152: C4.1 59.63,6.12 R30.1 59.59,4.58 R32.2 58.76,4.55 58.52,4.3 58.52,3.35 58.1,2.93 54.79,2.93 54.22,3.5 52.92,3.5 52.35,2.93 49.87,2.93 v49.53,2.59 | v47.43,3.77 47.17,3.51 U7.3
  Bottom 0.152: v49.53,2.59 48.2,2.59 47.43,3.35 v47.43,3.77
OP_CUR_3V3_H
  Top 0.152: POWER.11 75.69,9.42 79.63,9.42 80.21,8.84 80.21,8.12 80.21,8.02 80.21,7.94 74.51,2.23 65.49,2.23 65.14,2.59 C6.1
  Top 0.305: U4.2 67.49,8.05 R28.2 65.59,3.51 C6.1
OP_CUR_5V_H  (via drill 0.35)
  Top 0.152: R33.2 57.42,9.87 57.42,8.65 58.21,7.86 R30.2 62.18,7.86 C4.2 62.22,8.53 v63.44,9.75
  Top 0.508: L1.P$2 56.94,7.76 55.37,9.32 C19.2 55.41,9.98 R33.2
  Bottom 0.152: POWER.9 75.46,9.75 v63.44,9.75
RX1  (via drill 0.35)
  Top 0.152: OK1.4 30.67,40.13 R5.1 30.57,39.18 v30.1,38.71 | v42.37,33.68 44.67,33.68 U1.6
  Bottom 0.152: v30.1,38.71 31.47,40.08 36.92,40.08 42.37,34.63 v42.37,33.68
RX2  (via drill 0.35)
  Top 0.152: OK2.4 28.93,30.71 v30.1,30.71 | v31.62,23.96 R6.1 | v42.44,32.35 44.66,32.35 U1.7
  Bottom 0.152: v30.1,30.71 30.1,25.49 v31.62,23.96 32.5,23.96 32.8,24.27 32.8,26.21 33.6,27.01 40.37,27.01 41.96,25.42 42.47,25.42 42.8,25.75 42.82,25.75 42.82,31.97 v42.44,32.35
RXDATA  (via drill 0.35)
  Top 0.152: v57.84,36.99 58.48,36.35 58.48,36.31 58.6,36.19 U1.35
  Bottom 0.152: v57.84,36.99 61.53,40.69 62.37,40.69 64.99,43.31 FTDI.5
SCAP
  Top 0.152: JP3.1 40.57,18.97 R19.1
  Top 0.305: R19.1 40.05,18.97 40.77,18.25 40.77,15.11 | 40.77,15.11 C20.+ | D4.A 50.32,16.84 42.49,16.84 40.77,15.11
SCAPDRV
  Top 0.152: T1.E 37.74,19.76 38.02,20.04 40.35,20.04 40.92,20.61 40.92,21.83 JP1.1
  Top 0.305: T1.E 39.39,17.1 R19.2
SCL  (via drill 0.35)
  Top 0.152: v66.1,17.64 76.84,17.64 I2C.1 | v60.5,25.38 59.82,25.38 55.48,29.71 55.48,33.15 55.98,33.66 57.94,33.66 57.94,33.65 U1.33 | R7.1 93.88,15.96 v92.62,14.71 | v91.17,13.26 91.14,13.3 84.35,13.3 v84.31,13.34 84.31,13.95 85.42,15.05 85.42,16.15 85.99,16.72 U3.14
  Bottom 0.152: v66.1,17.64 v66.09,17.63 66.08,17.64 61.68,17.64 61.03,18.29 61.03,24.46 60.5,24.99 v60.5,25.38 | v92.62,14.71 v91.17,13.26 | v84.31,13.34 81.15,13.34 I2C.1
SDA  (via drill 0.35)
  Top 0.152: v60.42,24.21 60.42,24.3 55.17,29.55 55.17,36.83 56.33,37.99 60.54,37.99 61.07,37.46 U1.36 | v64.96,16.8 66.07,16.8 66.83,16.04 69.23,16.04 70.06,16.88 70.97,16.88 72.4,15.44 I2C.2 | U3.13 v85.05,17.22 v85.04,17.23 | R36.1 97.96,16.27 98.11,16.42 98.11,19.16 97.46,19.81 v94.72,19.81 | v91.14,19.81 89.36,19.81 v89.35,19.82
  Bottom 0.152: v64.96,16.8 62.07,16.8 60.69,18.18 60.69,23.94 v60.42,24.21 | I2C.2 78.29,17.23 v85.04,17.23 87.62,19.81 89,19.81 89.01,19.82 v89.35,19.82 | v94.72,19.81 v91.14,19.81
TX1  (via drill 0.35)
  Top 0.152: v57.07,32.04 59.27,29.84 U1.30 | OK3.2 28.98,24.13 30.33,22.78 30.33,22.74 v30.48,22.59
  Bottom 0.152: v57.07,32.04 55.7,32.04 44.08,20.42 44.08,14.36 43.09,13.37 31.77,13.37 31.31,13.83 31.31,21.75 v30.48,22.59
TX2  (via drill 0.35)
  Top 0.152: v58.14,32.7 59.73,31.11 U1.31 | v30.25,16.69 28.77,15.21 OK4.2
  Bottom 0.152: v58.14,32.7 58.14,32.17 46.65,20.69 44.78,20.69 44.39,20.29 44.39,14.21 43.24,13.07 30.25,13.07 29.91,13.41 29.91,16.34 v30.25,16.69
TXDATA  (via drill 0.35)
  Top 0.152: U1.34 57.78,34.92 v57.23,35.47
  Bottom 0.152: v57.23,35.47 61.95,40.2 65.59,40.2 FTDI.4
VSENSE  (via drill 0.35)
  Top 0.152: 39.78,10.67 39.78,12.8 38.6,13.98 36.11,13.98 36.07,14.02 v35.2,14.02 | 39.78,10.67 39.78,6.74 39.7,6.67 | v42.37,35.97 42.59,36.19 U1.4 | 39.7,6.67 SJ2.1 SJ2.2 37.87,8.19 37.41,8.65 37.41,11.47 37.22,11.66 35.47,11.66 35.28,11.47 | SJ3.1 39.36,10.25 39.78,10.67 | 39.7,6.67 39.7,5.83 v41.3,4.23 | R27.1 35.28,9.52 35.28,11.47 | 35.28,11.47 35.09,11.66 33.19,11.66 32.28,10.76 Z1.2
  Bottom 0.152: v35.2,14.02 35.2,20.61 39.7,25.11 42.61,25.11 43.13,25.63 43.13,35.21 v42.37,35.97 | v41.3,4.23 45.3,4.23 47.59,1.94 77.84,1.94 83.06,7.16 83.06,9.87 84.16,10.97 POWER.3

## Text on the board
tPlace: TX | CMD | GND | RX | L | CLK | RX | TX | D3 | H | 5V | D2 | +12V | D1 | GND | D0 | TX2B | TX2A | CLK | DAT | TX1B | TX1A | RX2B | RX2A | +12V | RX1B | GND | RX1A | WIBL - V2.4.1 / 2023-02-07
bPlace: (c) 2022 Center for Coastal and Ocean Mapping / University of New Hampshire / 2023-02-07 V2.4.1
tNames: U5 | JLCJLCJLCJLC | D5 | D4 | D7 | D7 | Z2 | VSENSE | D6 | OP-3V3 | OP-5V | IP-3V3 | IP-5V | BOOT | IP | D2 | D1 | D3